# Altium PCB Laser_TFT_Display.PcbDoc
Units mm, origin at the board's own origin, x right, y up, seen from the top; angles counter-clockwise.
Board outline 53.36 x 33.27 mm, 2 copper layers (Top Layer, Bottom Layer); 15 components, 70 nets, 96 pads, 5 vias.
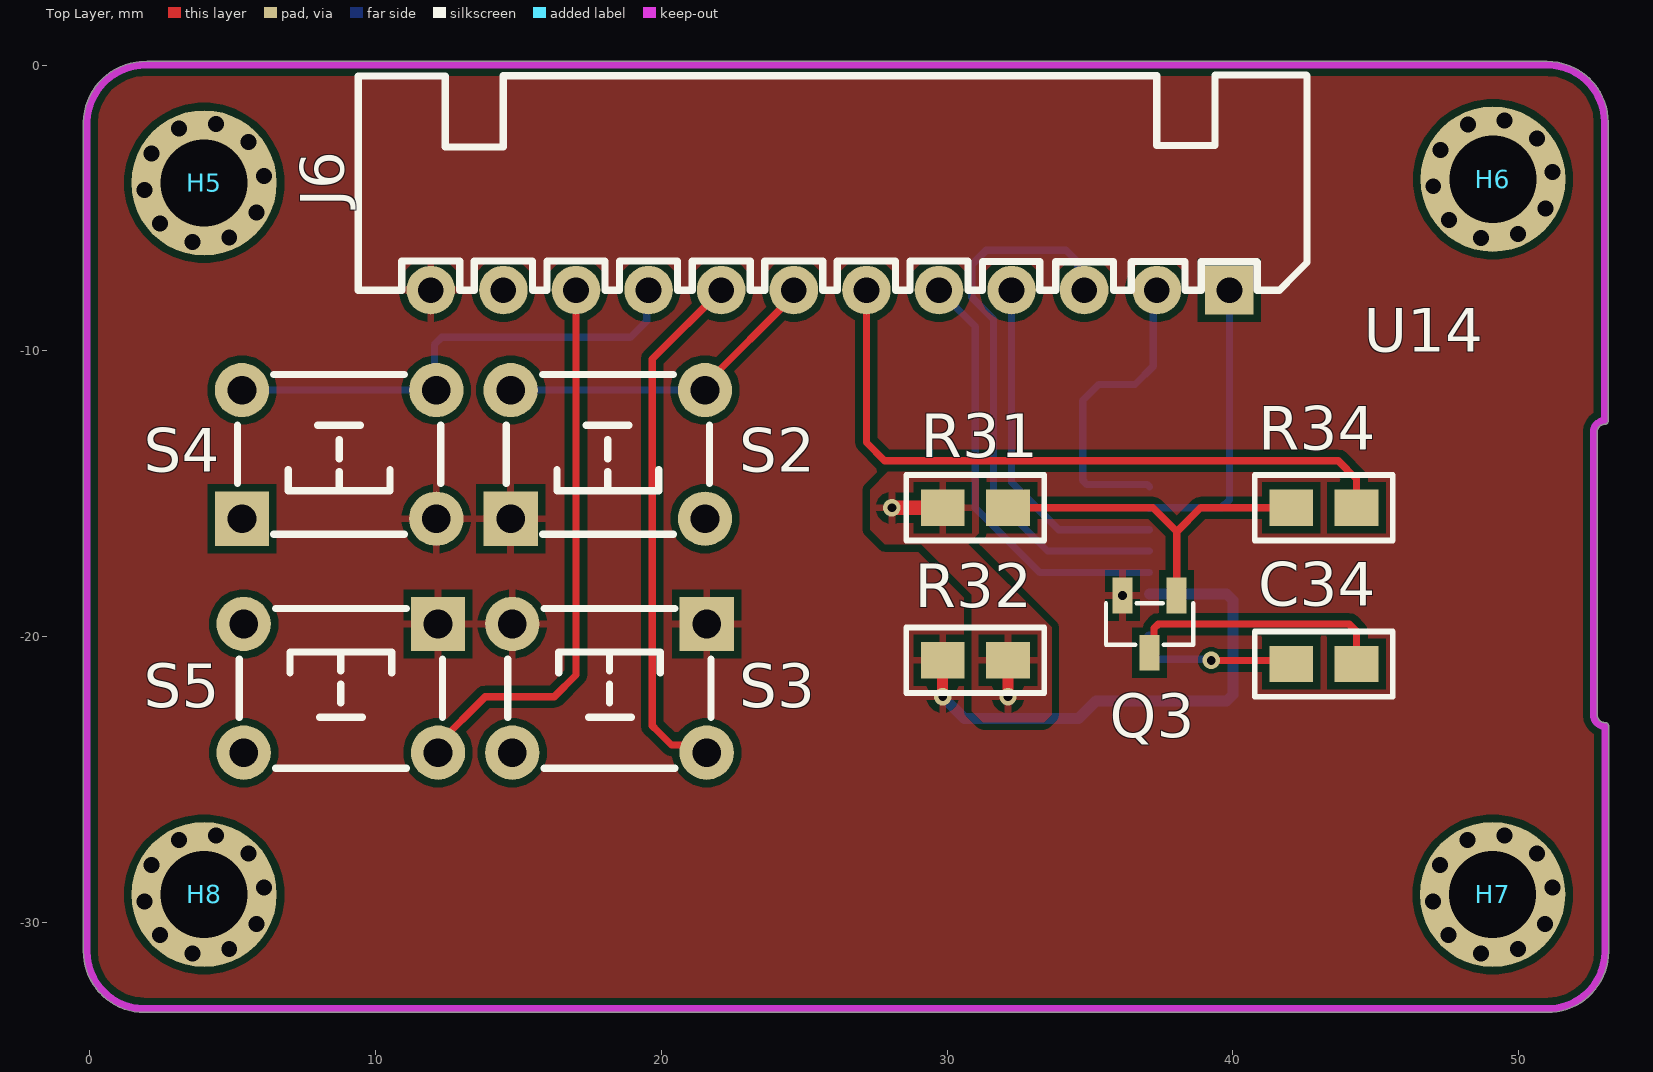
[diagram p0: Top Layer view]
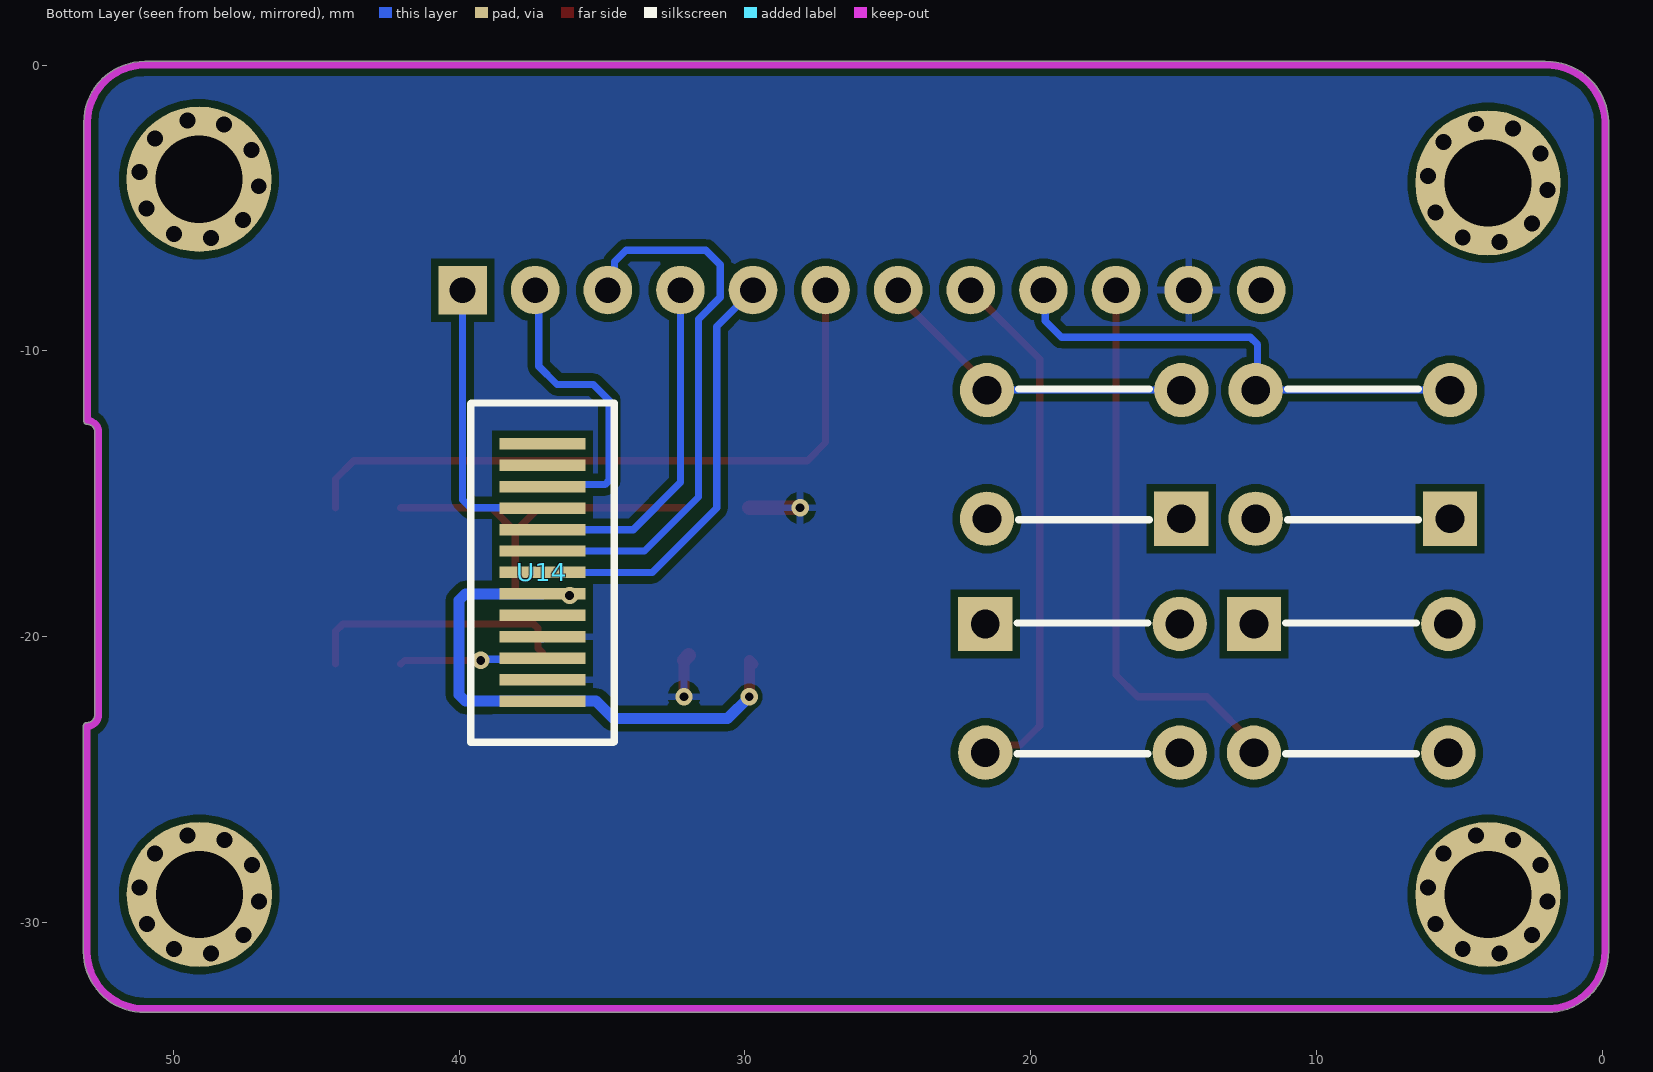
[diagram p1: Bottom Layer view, seen from below]

## Layer stack, top to bottom
Top Solder: solder mask 0.0102, Solder Resist, Dk 3.5
Top Layer: signal copper 0.0356
Dielectric 1: dielectric 0.32, FR-4, Dk 4.8
Bottom Layer: signal copper 0.0356
Bottom Solder: solder mask 0.0102, Solder Resist, Dk 3.5

## Board outline
1.914,-33.142 ccw(c1.914,-33.015) 1.957,-33.135 ccw(c2,-33.015) 2,-33.142 51,-33.142 ccw(c51.008,-31.007) 53.142,-31.015 ccw(c53.015,-31.015) 53.142,-31.015 53.142,-23.129 ccw(c53.015,-23.129) 53.014,-23.002 cw(c53.015,-22.733) 52.746,-22.733 52.746,-12.827 cw(c53,-12.827) 53,-12.573 ccw(c53,-12.446) 53.127,-12.446 53.127,-2.015 ccw(c50.993,-2.007) 53.127,-2.007 ccw(c50.993,-2.007) 51,0.127 ccw(c51,0) 51,0.127 2.001,0.127 cw(c1.957,-2.043) 2.003,0.127 2.001,0.127 ccw(c1.957,-2.043) -0.213,-1.997 ccw(c-0.086,-2) -0.213,-2 -0.213,-31 ccw(c1.922,-31.007)

## Design rules (kind name [scope] priority, off if disabled: settings)
Clearance [All] p1: gap=0.152 ignorepadtopadclearanceinfootprint=FALSE except(0.203: Arc-Arc Arc-Track Track-Track; 0.254: Arc-Fill Arc-Poly Arc-Region Track-Fill Track-Poly Track-Region SMDPad-Fill SMDPad-Poly SMDPad-Region THPad-Fill THPad-Poly THPad-Region Fill-Fill Fill-Poly Fill-Region Poly-Poly Poly-Region Region-Region)
PolygonConnect [All] p1: connectstyle=Relief reliefconductorwidth=0.254 reliefentries=4 polygonreliefangle="90 Angle" airgapwidth=0.254
RoutingVias RoutingVias_PWR [All] p1: holewidth=0.305 width=0.61 viastyle="Through Hole" minholewidth=0.305 minwidth=0.61 maxholewidth=0.305 maxwidth=0.61
RoutingVias [All] p2: holewidth=0.254 width=0.508 viastyle="Through Hole" minholewidth=0.254 minwidth=0.508 maxholewidth=0.254 maxwidth=0.508
SolderMaskExpansion [All] p1: expansion=0.102 istentingtop=FALSE
Width PWR [InNetClass('PWR')] p1: maxlimit=0.762 minlimit=0.381 preferedwidth=0.381
Width [All] p2: maxlimit=0.254 minlimit=0.254 preferedwidth=0.254
30 further rules are at their usual default settings.

## Classes and differential pairs
net class PWR: "+5V  TEC_Con" +5V_Anagle "+8V  V-I_Trans" "+12V Vin" DGND GND VDD VREF
component class U_STM32_System: C34 H7 H8 J6 Q3 R31 R32 R34 S3 S4 S5 U10 U14

## Components (designator, comment, footprint, x,y, rotation, side; value= is the part's Value field where it differs from the comment)
C34 "1uF" 0805R 29.845,-20.823 r0 top
H5 "固定孔" 铜柱孔3 4.01,-4.122 r0 top
H6 "固定孔" 铜柱孔3 49.096,-3.995 r0 top
H7 "固定孔" 铜柱孔3 49.086,-29.015 r0 top
H8 "固定孔" 铜柱孔3 4.01,-29.015 r0 top
J6 "CON12" XH2.54-WI-12P 25.908,-7.874 r180 top
Q3 "S8050_C908252" SOT-23-3_L2.9-W1.3-P1.90-LS2.4-BR 37.084,-19.558 r90 top
R31 "1K" 0805R 44.323,-15.489 r180 top
R32 "10" 0805R 44.323,-20.955 r180 top
R34 "10K" 0805R 29.845,-15.489 r0 top
S2 "SW-SPST" "TSW DIP-6*6*5" 18.161,-13.838 r0 top
S3 "SW-SPST" "TSW DIP-6*6*5" 18.161,-21.585 r180 top
S4 "SW-SPST" "TSW DIP-6*6*5" 8.763,-13.838 r0 top
S5 "SW-SPST" "TSW DIP-6*6*5" 8.763,-21.585 r180 top
U14 "TFT 0.96'" TFT0.96-13P 37.084,-13.251 r270 top

## Footprints (in the part's own frame and the unit in brackets; to place one, negate y for a bottom-side part, rotate by r counter-clockwise, add the part's x,y. Pads: shape width x height; smd on the part's side, far side on the other; paste and mask are expansions set on the pad)
0805R [mil]
  rect 60x50 smd: 1(0,0) 2(90,0)
  silkscreen extent -50,-45 140,45, body extent 5,-25 83,25, height 22
SOT-23-3_L2.9-W1.3-P1.90-LS2.4-BR [mm]
  rect 1.25x0.7 smd: 1(1,-0.95) 2(1,0.95) 3(-1,0)
  silkscreen extent -0.73,-1.53 0.73,1.53
TFT0.96-13P [mm] "长28mm，宽14mm，脚距0.75mm"
  rect 0.4x3 smd far side: 1(0,0) 2(0.75,0) 3(1.5,0) 4(2.25,0) 5(3,0) 6(3.75,0) 7(4.5,0) 8(5.25,0) 9(6,0) 10(6.75,0) 11(7.5,0) 12(8.25,0) 13(9,0)
"TSW DIP-6*6*5" [mm]
  rect 1.9x1.9 hole 1: 1(-3.429,-2.032)
  round 1.9 hole 1: 2(-3.429,2.468) 3(3.371,2.468) 4(3.371,-2.032)
  silkscreen extent -3.58,-2.58 3.53,3.01
XH2.54-WI-12P [mm] "接插件，12P"
  rect 1.7x1.7 hole 0.9: 1(-13.97,0)
  round 1.7 hole 0.9: 2(-11.43,0) 3(-8.89,0) 4(-6.35,0) 5(-3.81,0) 6(-1.27,0) 7(1.27,0) 8(3.81,0) 9(6.35,0) 10(8.89,0) 11(11.43,0) 12(13.97,0)
  silkscreen extent -16.69,-7.53 16.51,0, body extent -16.47,-7.35 16.47,0.35, height 5.75
铜柱孔3 [mil]
  round 23 hole 22: 11(-82.21,-9.67) 11(-72.19,40.5) 11(-60.83,-56.14) 11(-34.6,75.2) 11(-16.21,-81.17) 11(16.21,81.17) 11(34.6,-75.2) 11(60.83,56.14) 11(72.19,-40.5) 11(82.21,9.67)
  round 200 hole 120: 11(0,0)

## Part data
C34: library part 普通电容, "Capacitor"
J6: "Connector"
Q3: BOM_JLCPCB Part Class="Extended Part", BOM_Manufacturer=FUXINSEMI, BOM_Manufacturer Part=S8050, BOM_Supplier=LCSC, BOM_Supplier Part=C908252, Contributor=LCSC, spicePre=Q, spiceSymbolName=S8050_C908252
R31 R32 R34: library part 普通电阻
S2 S3 S4 S5: "Single-Pole, Single-Throw Switch", LatestRevisionDate=17-Jul-2002, LatestRevisionNote="Re-released for DXP Platform.", PackageReference=SPST-2, Published=24-Mar-1999, Publisher="Altium Limited"
U14: library part TFT显示屏

## Via types
v1: diameter 0.61, hole 0.305, Top Layer to Bottom Layer, 5 vias

## Nets (pads, with @x,y where several pads share a name; then routed paths per layer and width w, separated by ;. In a path a pad name is that pad's centre, name@x,y a point inside that pad or via, vN(x,y) a via of type N, cw(c..) or ccw(c..) an arc to the next point about the centre after c; other vN are vias at no path point)
"+5V  TEC_Con": 
+5V_Anagle: 
"+8V  V-I_Trans": 
"+12V Vin": 
AD_SCL: 
AD_SDA: 
DA_C\S\: 
DA_MOSI: 
DA_SCK: 
DGND: C34.1 J6.12 Q3.2 S2.1 S3.1 S3.4 S4.4 S5.1 U14.8 U14.13 | length 18.6
  Top Layer w0.381: C34.1@29.713,-20.955 C34.1 v1(29.845,-22.098)
  Bottom Layer w0.381: v1(29.845,-22.098) 30.607,-22.86 34.596,-22.86 35.205,-22.251 U14.13 39.782,-22.251 40.005,-22.028 40.005,-18.724 39.782,-18.501 U14.8
  other v1: 36.134,-18.558
GND: 
LEDK: R32.2 U14.11 | length 5
  Top Layer w0.254: v1(39.243,-20.828) 41.91,-20.828 R32.2
  Bottom Layer w0.254: U14.11 37.122,-20.789 39.204,-20.789 v1(39.243,-20.828)
NetC3_1: 
NetC6_1: 
NetC7_1: 
NetC7_2: 
NetC8_2: 
NetC9_1: 
NetC9_2: 
NetC15_1: 
NetC19_1: 
NetD1_2: 
NetD3_2: 
NetD4_A: 
NetD5_A: 
NetJ1_1: 
NetJ2_1: 
NetJ3_1: 
NetL2_1: 
NetL2_2: 
NetQ1_1: 
NetQ1_2: 
NetQ1_3: 
NetQ2_1: 
NetQ2_3: 
NetQ3_1: Q3.1 R31.2 R34.2 | length 12.7
  Top Layer w0.254: R34.2 37.206,-15.489 38.034,-16.317 Q3.1@38.034,-18.431 ; 38.034,-16.322 38.867,-15.489 R31.2
NetQ3_3: Q3.3 R32.1 | length 9.3
  Top Layer w0.254: Q3.3 37.239,-20.403 37.239,-19.707 37.387,-19.558 44.069,-19.558 44.323,-19.812 R32.1
NetR3_2: 
NetR4_1: 
NetR5_1: 
NetR8_1: 
NetR8_2: 
NetR18_1: 
NetR19_1: 
NetR20_1: 
NetR20_2: 
NetR22_1: 
NetR23_1: 
NetR25_1: 
NRST: 
OSC32-IN: 
OSC32-OUT: 
OSC-IN: 
OSC-OUT: 
PB8: J6.7 S2.2 S2.3 | length 11.9
  Top Layer w0.254: S2.3 21.532,-11.175 24.638,-8.069 J6.7 J6.7@24.423,-7.659
  Bottom Layer w0.254: S2.2 S2.3
PB9: J6.8 S3.2 | length 18.5
  Top Layer w0.254: S3.2 21.322,-23.785 20.356,-23.785 19.885,-23.314 19.685,-23.114 19.685,-10.287 J6.8
PB10: J6.9 S4.2 S4.3 | length 18
  Top Layer w0.254: J6.9@19.304,-8.128 J6.9 J6.9@19.558,-7.493
  Bottom Layer w0.254: S4.2 S4.3 12.065,-11.301 12.065,-9.779 12.319,-9.525 18.923,-9.525 19.492,-8.956 19.492,-7.94 J6.9
PB11: J6.10 S5.2 | length 19.6
  Top Layer w0.254: S5.2 12.192,-23.749 13.843,-22.098 16.256,-22.098 17.018,-21.336 J6.10
PC13: 
READY: 
SWCLK: 
SWDIO: 
TFT_BLK: J6.6 R31.1 | length 24
  Top Layer w0.254: J6.6 27.178,-13.208 27.813,-13.843 43.688,-13.843 44.323,-14.478 R31.1
TFT_CS: J6.5 U14.7 | length 15.2
  Bottom Layer w0.254: J6.5 30.988,-9.144 30.988,-15.494 33.245,-17.751 U14.7
TFT_DC: J6.4 U14.5 | length 12.2
  Bottom Layer w0.254: J6.4 32.258,-14.605 33.909,-16.256 37.079,-16.256 U14.5
TFT_RES: J6.3 U14.6 | length 19.9
  Bottom Layer w0.254: J6.3 34.561,-7.637 34.561,-6.878 34.161,-6.477 31.369,-6.477 30.861,-6.985 30.861,-8.128 31.623,-8.89 31.623,-15.113 33.511,-17.001 U14.6
TFT_SCL: J6.1 U14.4 | length 10.2
  Bottom Layer w0.254: U14.4 37.096,-15.489 39.595,-15.489 39.878,-15.206 J6.1
TFT_SDA: J6.2 U14.3 | length 10.9
  Bottom Layer w0.254: U14.3 37.011,-14.678 34.894,-14.678 34.745,-14.529 34.745,-11.737 35.306,-11.176 36.576,-11.176 37.211,-10.541 37.211,-8.001 J6.2
VDD: C34.2 J6.11 R34.1 U14.10 U14.12 | length 3.5
  Top Layer w0.381: v1(32.131,-22.098) C34.2
  Top Layer w0.508: v1(28.072,-15.489) R34.1 ; C34.2@31.961,-20.653 C34.2
  Bottom Layer w0.381: U14.10@37.075,-20.01 U14.10
  Bottom Layer w0.508: J6.11 J6.11@14.605,-8.001 ; v1@28.067,-15.494 v1(28.072,-15.489)
VREF: 
pads on no net: H5.11 H6.11 H7.11 H8.11 S2.4 S3.3 S4.1 S5.3 S5.4 U14.1 U14.2 U14.9

## Polygon pours and split planes (outlines as drawn)
DGND on Top Layer "DGND_L01_P015" (solid, pour order 15): 10.414,-13.97 15.802,-13.97 16.412,-14.58 16.412,-20.926 15.85,-21.488 10.312,-21.488 9.652,-20.828 9.652,-14.732
DGND on Top Layer "DGND_L01_P012" (solid, pour order 12): -0.254,0.127 53.34,0.127 52.746,-0.467 52.746,-33.02 -0.127,-33.02 -0.254,-33.147
VDD on Top Layer "VDD_L01_P011" (solid, pour order 11): 30.861,-18.415 30.861,-22.606 31.242,-22.987 33.401,-22.987 33.655,-22.733 33.655,-19.67 32.527,-18.542
VDD on Top Layer "VDD_L01_P009" (solid, pour order 9): 29.598,-16.693 30.678,-16.693 31.059,-17.074 33.218,-19.233 32.837,-19.614 31.567,-19.614 31.757,-19.424 28.963,-16.63
VDD on Top Layer "VDD_L01_P008" (solid, pour order 8): 27.94,-14.224 30.866,-14.224 31.115,-14.473 31.115,-16.383 30.734,-16.764 27.813,-16.764 27.305,-16.256 27.305,-14.859
VDD on Bottom Layer "VDD_L02_P016" (solid, pour order 16): -0.254,0.127 53.34,0.127 52.746,-0.467 52.746,-33.02 -0.127,-33.02 -0.254,-33.147

## Keep-outs
Keep-Out Layer:
  lines w0.254: 1.914,-33.015 cw(c1.922,-31.007) -0.086,-31 -0.086,-2 cw(c1.957,-2.043) 2,0 51,0 cw(c50.993,-2.007) 53,-2.015 53,-12.446 ccw(c53,-12.827) 52.619,-12.827 52.619,-22.733 ccw(c53.015,-22.733) 53.015,-23.129 53.015,-31.015 cw(c51.008,-31.007) 51,-33.015 2,-33.015

## Dimensions
2,0 to 2,-33.015 on Mechanical 1